# EAGLE board SMTCylonV13BurnV2 (EAGLE 5.07)
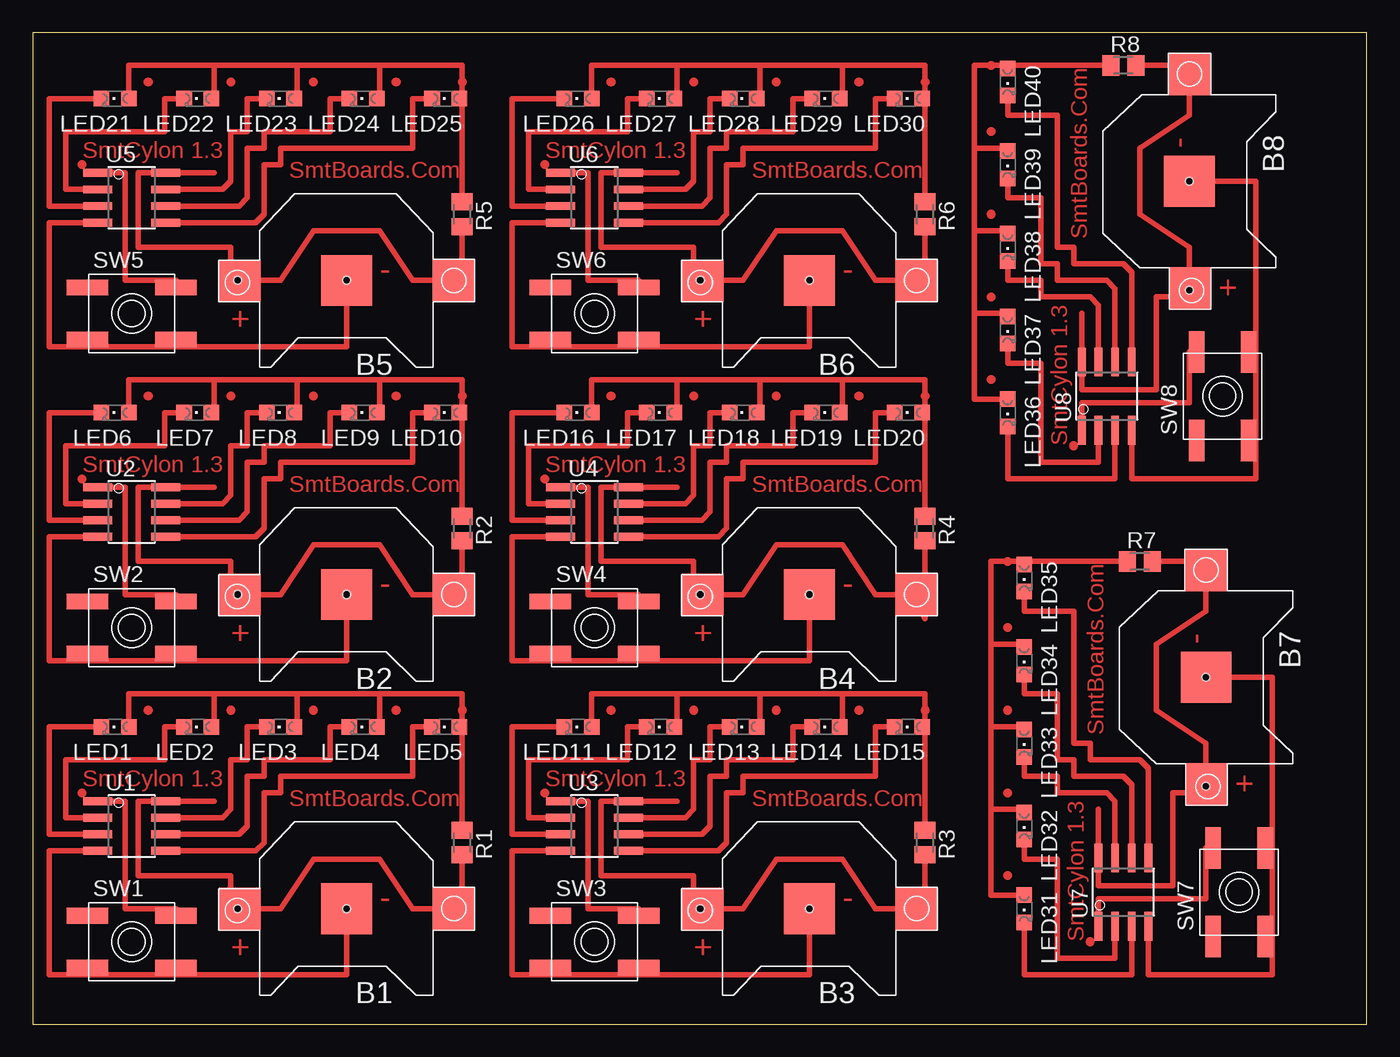
[diagram p0: board, top side]

Size 102.54 x 76.19 mm. Coordinates in mm from the lower left corner, seen from the top.
Outline: 0,0 102.54,0 102.54,76.19 0,76.19 0,0
Copper layers (1*16): Top 0.035mm / dielectric 1.5mm / Bottom 0.035mm
Design rules "default": minimum track width 10mil, minimum drill 24mil, track to track 8mil, track to pad 8mil, pad to pad 8mil, via to via 8mil, smd to smd 8mil, copper to edge 40mil, drill to drill 8mil, minimum pad ring 10mil, minimum via ring 8mil, stop-mask expansion 4mil, vias tented up to drill 0mil, thermal gap 10mil
Holes 0.6 mm at 15.75,8.89 24.13,8.89 15.75,33.02 24.13,33.02 51.31,8.89 59.69,8.89 51.31,33.02 59.69,33.02 15.75,57.15 24.13,57.15 51.31,57.15 59.69,57.15 90.17,18.29 90.17,26.67 88.9,56.39 88.9,64.77

## Footprints (pad centres in the part's own frame; a part is rotated, then mirrored left to right if it is on the bottom)
CR1220-SMD = smd 3.2 x 3.2: +$1 -8.2,0; +$2 8.2,0 | smd 3.9 x 3.9: - 0,0
CHIPLED_0805 = smd 1.2 x 1.2: A 0,-1.05; C 0,1.05
M0805 = smd 1.3 x 1.6: 1 -0.95,0; 2 0.95,0
EVQ-Q2 = smd 3.2 x 1.2: A -3.4,-2; A' 3.4,-2; B -3.4,2; B' 3.4,2
SO08 = smd 0.61 x 2.21: 1 -1.905,-2.616; 2 -0.635,-2.616; 3 0.635,-2.616; 4 1.905,-2.616; 5 1.905,2.616; 6 0.635,2.616; 7 -0.635,2.616; 8 -1.905,2.616

## Placement (x,y rotation side)
B1  [CR1220-SMD]  24.13,8.89 180 top
B2  [CR1220-SMD]  24.13,33.02 180 top
B3  [CR1220-SMD]  59.69,8.89 180 top
B4  [CR1220-SMD]  59.69,33.02 180 top
B5  [CR1220-SMD]  24.13,57.15 180 top
B6  [CR1220-SMD]  59.69,57.15 180 top
B7  [CR1220-SMD]  90.17,26.67 270 top
B8  [CR1220-SMD]  88.9,64.77 270 top
LED1  [CHIPLED_0805]  6.35,22.86 90 top
LED2  [CHIPLED_0805]  12.7,22.86 90 top
LED3  [CHIPLED_0805]  19.05,22.86 90 top
LED4  [CHIPLED_0805]  25.4,22.86 90 top
LED5  [CHIPLED_0805]  31.75,22.86 90 top
LED6  [CHIPLED_0805]  6.35,46.99 90 top
LED7  [CHIPLED_0805]  12.7,46.99 90 top
LED8  [CHIPLED_0805]  19.05,46.99 90 top
LED9  [CHIPLED_0805]  25.4,46.99 90 top
LED10  [CHIPLED_0805]  31.75,46.99 90 top
LED11  [CHIPLED_0805]  41.91,22.86 90 top
LED12  [CHIPLED_0805]  48.26,22.86 90 top
LED13  [CHIPLED_0805]  54.61,22.86 90 top
LED14  [CHIPLED_0805]  60.96,22.86 90 top
LED15  [CHIPLED_0805]  67.31,22.86 90 top
LED16  [CHIPLED_0805]  41.91,46.99 90 top
LED17  [CHIPLED_0805]  48.26,46.99 90 top
LED18  [CHIPLED_0805]  54.61,46.99 90 top
LED19  [CHIPLED_0805]  60.96,46.99 90 top
LED20  [CHIPLED_0805]  67.31,46.99 90 top
LED21  [CHIPLED_0805]  6.35,71.12 90 top
LED22  [CHIPLED_0805]  12.7,71.12 90 top
LED23  [CHIPLED_0805]  19.05,71.12 90 top
LED24  [CHIPLED_0805]  25.4,71.12 90 top
LED25  [CHIPLED_0805]  31.75,71.12 90 top
LED26  [CHIPLED_0805]  41.91,71.12 90 top
LED27  [CHIPLED_0805]  48.26,71.12 90 top
LED28  [CHIPLED_0805]  54.61,71.12 90 top
LED29  [CHIPLED_0805]  60.96,71.12 90 top
LED30  [CHIPLED_0805]  67.31,71.12 90 top
LED31  [CHIPLED_0805]  76.2,8.89 180 top
LED32  [CHIPLED_0805]  76.2,15.24 180 top
LED33  [CHIPLED_0805]  76.2,21.59 180 top
LED34  [CHIPLED_0805]  76.2,27.94 180 top
LED35  [CHIPLED_0805]  76.2,34.29 180 top
LED36  [CHIPLED_0805]  74.93,46.99 180 top
LED37  [CHIPLED_0805]  74.93,53.34 180 top
LED38  [CHIPLED_0805]  74.93,59.69 180 top
LED39  [CHIPLED_0805]  74.93,66.04 180 top
LED40  [CHIPLED_0805]  74.93,72.39 180 top
R1  180  [M0805]  33.02,13.97 270 top
R2  180  [M0805]  33.02,38.1 270 top
R3  180  [M0805]  68.58,13.97 270 top
R4  180  [M0805]  68.58,38.1 270 top
R5  180  [M0805]  33.02,62.23 270 top
R6  180  [M0805]  68.58,62.23 270 top
R7  180  [M0805]  85.09,35.56 0 top
R8  180  [M0805]  83.82,73.66 0 top
SW1  EVQQ2  [EVQ-Q2]  7.62,6.35 0 top
SW2  EVQQ2  [EVQ-Q2]  7.62,30.48 0 top
SW3  EVQQ2  [EVQ-Q2]  43.18,6.35 0 top
SW4  EVQQ2  [EVQ-Q2]  43.18,30.48 0 top
SW5  EVQQ2  [EVQ-Q2]  7.62,54.61 0 top
SW6  EVQQ2  [EVQ-Q2]  43.18,54.61 0 top
SW7  EVQQ2  [EVQ-Q2]  92.71,10.16 90 top
SW8  EVQQ2  [EVQ-Q2]  91.44,48.26 90 top
U1  TINY13S2  [SO08]  7.62,15.24 270 top
U2  TINY13S2  [SO08]  7.62,39.37 270 top
U3  TINY13S2  [SO08]  43.18,15.24 270 top
U4  TINY13S2  [SO08]  43.18,39.37 270 top
U5  TINY13S2  [SO08]  7.62,63.5 270 top
U6  TINY13S2  [SO08]  43.18,63.5 270 top
U7  TINY13S2  [SO08]  83.82,10.16 0 top
U8  TINY13S2  [SO08]  82.55,48.26 0 top

## Library data of the parts
B1-B8 R1-R8 SW1-SW8 = adafruit
LED1-LED40 = led
U1-U8 = avr-6

## Nets
GND1: B2.- SW2.A U2.4
GND2: B3.- SW3.A U3.4
GND3: B4.- SW4.A U4.4
GND4: B1.- SW1.A U1.4
GND5: B5.- SW5.A U5.4
GND6: B6.- SW6.A U6.4
GND7: B7.- SW7.A U7.4
GND8: B8.- SW8.A U8.4
N$1: LED6.C U2.3
N$2: LED7.C U2.2
N$3: LED8.C U2.7
N$4: LED9.C U2.6
N$5: LED10.C U2.5
N$6: LED6.A LED7.A LED8.A LED9.A LED10.A R2.1
N$7: SW2.B' U2.1
N$9: LED11.C U3.3
N$10: LED12.C U3.2
N$11: LED13.C U3.7
N$12: LED14.C U3.6
N$13: LED15.C U3.5
N$14: LED11.A LED12.A LED13.A LED14.A LED15.A R3.1
N$15: SW3.B' U3.1
N$17: LED16.C U4.3
N$18: LED17.C U4.2
N$19: LED18.C U4.7
N$20: LED19.C U4.6
N$21: LED20.C U4.5
N$22: LED16.A LED17.A LED18.A LED19.A LED20.A R4.1
N$23: SW4.B' U4.1
N$25: LED21.C U5.3
N$26: LED22.C U5.2
N$27: LED23.C U5.7
N$28: LED24.C U5.6
N$29: LED25.C U5.5
N$30: LED21.A LED22.A LED23.A LED24.A LED25.A R5.1
N$31: SW5.B' U5.1
N$33: LED1.C U1.3
N$34: LED2.C U1.2
N$35: LED3.C U1.7
N$36: LED4.C U1.6
N$37: LED5.C U1.5
N$38: LED1.A LED2.A LED3.A LED4.A LED5.A R1.1
N$39: SW1.B' U1.1
N$41: LED26.C U6.3
N$42: LED27.C U6.2
N$43: LED28.C U6.7
N$44: LED29.C U6.6
N$45: LED30.C U6.5
N$46: LED26.A LED27.A LED28.A LED29.A LED30.A R6.1
N$47: SW6.B' U6.1
N$49: LED31.C U7.3
N$50: LED32.C U7.2
N$51: LED33.C U7.7
N$52: LED34.C U7.6
N$53: LED35.C U7.5
N$54: LED31.A LED32.A LED33.A LED34.A LED35.A R7.1
N$55: SW7.B' U7.1
N$57: LED36.C U8.3
N$58: LED37.C U8.2
N$59: LED38.C U8.7
N$60: LED39.C U8.6
N$61: LED40.C U8.5
N$62: LED36.A LED37.A LED38.A LED39.A LED40.A R8.1
N$63: SW8.B' U8.1
VCC1: B2.+$1 B2.+$2 R2.2 U2.8
VCC2: B3.+$1 B3.+$2 R3.2 U3.8
VCC3: B4.+$1 B4.+$2 R4.2 U4.8
VCC4: B1.+$1 B1.+$2 R1.2 U1.8
VCC5: B5.+$1 B5.+$2 R5.2 U5.8
VCC6: B6.+$1 B6.+$2 R6.2 U6.8
VCC7: B7.+$1 B7.+$2 R7.2 U7.8
VCC8: B8.+$1 B8.+$2 R8.2 U8.8

## Tracks (layer width: path | path; a pad name or v marks a point on that pad's centre or on a via)
GND1
  Top 0.406: U2.4 1.27,37.47 1.27,27.94 4.22,27.94 | 4.22,27.94 24.13,27.94 B2.- | 4.22,27.94 SW2.A
GND2
  Top 0.406: U3.4 36.83,13.34 36.83,3.81 39.78,3.81 | 39.78,3.81 59.69,3.81 B3.- | 39.78,3.81 SW3.A
GND3
  Top 0.406: U4.4 36.83,37.47 36.83,27.94 39.78,27.94 | 39.78,27.94 59.69,27.94 B4.- | 39.78,27.94 SW4.A
GND4
  Top 0.406: U1.4 1.27,13.34 1.27,3.81 4.22,3.81 | 4.22,3.81 24.13,3.81 B1.- | 4.22,3.81 SW1.A
GND5
  Top 0.406: U5.4 1.27,61.59 1.27,52.07 4.22,52.07 | 4.22,52.07 24.13,52.07 B5.- | 4.22,52.07 SW5.A
GND6
  Top 0.406: U6.4 36.83,61.59 36.83,52.07 39.78,52.07 | 39.78,52.07 59.69,52.07 B6.- | 39.78,52.07 SW6.A
GND7
  Top 0.406: U7.4 85.72,3.81 95.25,3.81 95.25,6.76 | 95.25,6.76 95.25,26.67 B7.- | 95.25,6.76 SW7.A
GND8
  Top 0.406: U8.4 84.45,41.91 93.98,41.91 93.98,44.86 | 93.98,44.86 93.98,64.77 B8.- | 93.98,44.86 SW8.A
N$1
  Top 0.406: U2.3 1.27,38.73 1.27,46.99 LED6.C
N$2
  Top 0.406: U2.2 2.54,40.01 2.54,44.45 10.16,44.45 10.16,46.99 LED7.C
N$3
  Top 0.406: LED8.C 16.51,46.99 16.51,44.45 15.24,44.45 15.24,40.64 14.61,40.01 U2.7
N$4
  Top 0.406: LED9.C 22.86,46.99 22.86,44.45 17.78,44.45 17.78,43.18 16.51,43.18 16.51,39.37 15.88,38.73 U2.6
N$5
  Top 0.406: U2.5 17.14,37.47 17.78,38.1 17.78,41.91 19.05,41.91 19.05,43.18 29.21,43.18 29.21,46.99 LED10.C
N$6
  Top 0.406: 32.8,39.05 R2.1 33.02,46.99 | 33.02,46.99 LED10.A | 33.02,46.99 33.02,49.53 26.67,49.53 | LED9.A 26.67,46.99 26.67,49.53 | 20.32,49.53 26.67,49.53 | LED8.A 20.32,46.99 20.32,49.53 | 13.97,49.53 20.32,49.53 | 13.97,49.53 13.97,46.99 LED7.A | 13.97,49.53 7.4,49.53 LED6.A
N$7
  Top 0.406: U2.1 7.11,41.27 7.11,33.02 11.02,33.02 SW2.B'
N$8
  Top 0.406: 10.16,41.27 13.97,41.27
N$9
  Top 0.406: U3.3 36.83,14.61 36.83,22.86 LED11.C
N$10
  Top 0.406: U3.2 38.1,15.88 38.1,20.32 45.72,20.32 45.72,22.86 LED12.C
N$11
  Top 0.406: LED13.C 52.07,22.86 52.07,20.32 50.8,20.32 50.8,16.51 50.16,15.88 U3.7
N$12
  Top 0.406: LED14.C 58.42,22.86 58.42,20.32 53.34,20.32 53.34,19.05 52.07,19.05 52.07,15.24 51.44,14.61 U3.6
N$13
  Top 0.406: U3.5 52.7,13.34 53.34,13.97 53.34,17.78 54.61,17.78 54.61,19.05 64.77,19.05 64.77,22.86 LED15.C
N$14
  Top 0.406: 68.36,14.92 R3.1 68.58,22.86 | 68.58,22.86 LED15.A | 68.58,22.86 68.58,25.4 62.23,25.4 | LED14.A 62.23,22.86 62.23,25.4 | 55.88,25.4 62.23,25.4 | LED13.A 55.88,22.86 55.88,25.4 | 49.53,25.4 55.88,25.4 | 49.53,25.4 49.53,22.86 LED12.A | 49.53,25.4 42.96,25.4 LED11.A
N$15
  Top 0.406: U3.1 42.67,17.14 42.67,8.89 46.58,8.89 SW3.B'
N$16
  Top 0.406: 45.72,17.14 49.53,17.14
N$17
  Top 0.406: U4.3 36.83,38.73 36.83,46.99 LED16.C
N$18
  Top 0.406: U4.2 38.1,40.01 38.1,44.45 45.72,44.45 45.72,46.99 LED17.C
N$19
  Top 0.406: LED18.C 52.07,46.99 52.07,44.45 50.8,44.45 50.8,40.64 50.16,40.01 U4.7
N$20
  Top 0.406: LED19.C 58.42,46.99 58.42,44.45 53.34,44.45 53.34,43.18 52.07,43.18 52.07,39.37 51.44,38.73 U4.6
N$21
  Top 0.406: U4.5 52.7,37.47 53.34,38.1 53.34,41.91 54.61,41.91 54.61,43.18 64.77,43.18 64.77,46.99 LED20.C
N$22
  Top 0.406: 68.36,39.05 R4.1 68.58,46.99 | 68.58,46.99 LED20.A | 68.58,46.99 68.58,49.53 62.23,49.53 | LED19.A 62.23,46.99 62.23,49.53 | 55.88,49.53 62.23,49.53 | LED18.A 55.88,46.99 55.88,49.53 | 49.53,49.53 55.88,49.53 | 49.53,49.53 49.53,46.99 LED17.A | 49.53,49.53 42.96,49.53 LED16.A
N$23
  Top 0.406: U4.1 42.67,41.27 42.67,33.02 46.58,33.02 SW4.B'
N$24
  Top 0.406: 45.72,41.27 49.53,41.27
N$25
  Top 0.406: U5.3 1.27,62.87 1.27,71.12 LED21.C
N$26
  Top 0.406: U5.2 2.54,64.14 2.54,68.58 10.16,68.58 10.16,71.12 LED22.C
N$27
  Top 0.406: LED23.C 16.51,71.12 16.51,68.58 15.24,68.58 15.24,64.77 14.61,64.14 U5.7
N$28
  Top 0.406: LED24.C 22.86,71.12 22.86,68.58 17.78,68.58 17.78,67.31 16.51,67.31 16.51,63.5 15.88,62.87 U5.6
N$29
  Top 0.406: U5.5 17.14,61.59 17.78,62.23 17.78,66.04 19.05,66.04 19.05,67.31 29.21,67.31 29.21,71.12 LED25.C
N$30
  Top 0.406: 32.8,63.18 R5.1 33.02,71.12 | 33.02,71.12 LED25.A | 33.02,71.12 33.02,73.66 26.67,73.66 | LED24.A 26.67,71.12 26.67,73.66 | 20.32,73.66 26.67,73.66 | LED23.A 20.32,71.12 20.32,73.66 | 13.97,73.66 20.32,73.66 | 13.97,73.66 13.97,71.12 LED22.A | 13.97,73.66 7.4,73.66 LED21.A
N$31
  Top 0.406: U5.1 7.11,65.41 7.11,57.15 11.02,57.15 SW5.B'
N$32
  Top 0.406: 10.16,65.41 13.97,65.41
N$33
  Top 0.406: U1.3 1.27,14.61 1.27,22.86 LED1.C
N$34
  Top 0.406: U1.2 2.54,15.88 2.54,20.32 10.16,20.32 10.16,22.86 LED2.C
N$35
  Top 0.406: LED3.C 16.51,22.86 16.51,20.32 15.24,20.32 15.24,16.51 14.61,15.88 U1.7
N$36
  Top 0.406: LED4.C 22.86,22.86 22.86,20.32 17.78,20.32 17.78,19.05 16.51,19.05 16.51,15.24 15.88,14.61 U1.6
N$37
  Top 0.406: U1.5 17.14,13.34 17.78,13.97 17.78,17.78 19.05,17.78 19.05,19.05 29.21,19.05 29.21,22.86 LED5.C
N$38
  Top 0.406: 32.8,14.92 R1.1 33.02,22.86 | 33.02,22.86 LED5.A | 33.02,22.86 33.02,25.4 26.67,25.4 | LED4.A 26.67,22.86 26.67,25.4 | 20.32,25.4 26.67,25.4 | LED3.A 20.32,22.86 20.32,25.4 | 13.97,25.4 20.32,25.4 | 13.97,25.4 13.97,22.86 LED2.A | 13.97,25.4 7.4,25.4 LED1.A
N$39
  Top 0.406: U1.1 7.11,17.14 7.11,8.89 11.02,8.89 SW1.B'
N$40
  Top 0.406: 10.16,17.14 13.97,17.14
N$41
  Top 0.406: U6.3 36.83,62.87 36.83,71.12 LED26.C
N$42
  Top 0.406: U6.2 38.1,64.14 38.1,68.58 45.72,68.58 45.72,71.12 LED27.C
N$43
  Top 0.406: LED28.C 52.07,71.12 52.07,68.58 50.8,68.58 50.8,64.77 50.16,64.14 U6.7
N$44
  Top 0.406: LED29.C 58.42,71.12 58.42,68.58 53.34,68.58 53.34,67.31 52.07,67.31 52.07,63.5 51.44,62.87 U6.6
N$45
  Top 0.406: U6.5 52.7,61.59 53.34,62.23 53.34,66.04 54.61,66.04 54.61,67.31 64.77,67.31 64.77,71.12 LED30.C
N$46
  Top 0.406: 68.36,63.18 R6.1 68.58,71.12 | 68.58,71.12 LED30.A | 68.58,71.12 68.58,73.66 62.23,73.66 | LED29.A 62.23,71.12 62.23,73.66 | 55.88,73.66 62.23,73.66 | LED28.A 55.88,71.12 55.88,73.66 | 49.53,73.66 55.88,73.66 | 49.53,73.66 49.53,71.12 LED27.A | 49.53,73.66 42.96,73.66 LED26.A
N$47
  Top 0.406: U6.1 42.67,65.41 42.67,57.15 46.58,57.15 SW6.B'
N$48
  Top 0.406: 45.72,65.41 49.53,65.41
N$49
  Top 0.406: U7.3 84.45,3.81 76.2,3.81 LED31.C
N$50
  Top 0.406: U7.2 83.19,5.08 78.74,5.08 78.74,12.7 76.2,12.7 LED32.C
N$51
  Top 0.406: LED33.C 76.2,19.05 78.74,19.05 78.74,17.78 82.55,17.78 83.19,17.14 U7.7
N$52
  Top 0.406: LED34.C 76.2,25.4 78.74,25.4 78.74,20.32 80.01,20.32 80.01,19.05 83.82,19.05 84.45,18.41 U7.6
N$53
  Top 0.406: U7.5 85.72,19.68 85.09,20.32 81.28,20.32 81.28,21.59 80.01,21.59 80.01,31.75 76.2,31.75 LED35.C
N$54
  Top 0.406: 84.14,35.34 R7.1 76.2,35.56 | 76.2,35.56 LED35.A | 76.2,35.56 73.66,35.56 73.66,29.21 | LED34.A 76.2,29.21 73.66,29.21 | 73.66,22.86 73.66,29.21 | LED33.A 76.2,22.86 73.66,22.86 | 73.66,16.51 73.66,22.86 | 73.66,16.51 76.2,16.51 LED32.A | 73.66,16.51 73.66,9.94 LED31.A
N$55
  Top 0.406: U7.1 81.92,9.65 90.17,9.65 90.17,13.56 SW7.B'
N$56
  Top 0.406: 81.92,12.7 81.92,16.51
N$57
  Top 0.406: U8.3 83.19,41.91 74.93,41.91 LED36.C
N$58
  Top 0.406: U8.2 81.92,43.18 77.47,43.18 77.47,50.8 74.93,50.8 LED37.C
N$59
  Top 0.406: LED38.C 74.93,57.15 77.47,57.15 77.47,55.88 81.28,55.88 81.92,55.24 U8.7
N$60
  Top 0.406: LED39.C 74.93,63.5 77.47,63.5 77.47,58.42 78.74,58.42 78.74,57.15 82.55,57.15 83.19,56.52 U8.6
N$61
  Top 0.406: U8.5 84.45,57.78 83.82,58.42 80.01,58.42 80.01,59.69 78.74,59.69 78.74,69.85 74.93,69.85 LED40.C
N$62
  Top 0.406: 82.87,73.44 R8.1 74.93,73.66 | 74.93,73.66 LED40.A | 74.93,73.66 72.39,73.66 72.39,67.31 | LED39.A 74.93,67.31 72.39,67.31 | 72.39,60.96 72.39,67.31 | LED38.A 74.93,60.96 72.39,60.96 | 72.39,54.61 72.39,60.96 | 72.39,54.61 74.93,54.61 LED37.A | 72.39,54.61 72.39,48.04 LED36.A
N$63
  Top 0.406: U8.1 80.64,47.75 88.9,47.75 88.9,51.66 SW8.B'
N$64
  Top 0.406: 80.64,50.8 80.64,54.61
VCC1
  Top 0.406: U2.8 8.13,41.27 8.13,35.56 15.24,35.56 15.24,33.02 B2.+$2 19.05,33.02 21.59,36.83 26.67,36.83 29.21,33.02 B2.+$1 33.02,33.71 R2.2
VCC2
  Top 0.406: U3.8 43.69,17.14 43.69,11.43 50.8,11.43 50.8,8.89 B3.+$2 54.61,8.89 57.15,12.7 62.23,12.7 64.77,8.89 B3.+$1 68.58,9.58 R3.2
VCC3
  Top 0.406: U4.8 43.69,41.27 43.69,35.56 50.8,35.56 50.8,33.02 B4.+$2 54.61,33.02 57.15,36.83 62.23,36.83 64.77,33.02 B4.+$1 68.58,31.17 R4.2
VCC4
  Top 0.406: U1.8 8.13,17.14 8.13,11.43 15.24,11.43 15.24,8.89 B1.+$2 19.05,8.89 21.59,12.7 26.67,12.7 29.21,8.89 B1.+$1 33.02,9.58 R1.2
VCC5
  Top 0.406: U5.8 8.13,65.41 8.13,59.69 15.24,59.69 15.24,57.15 B5.+$2 19.05,57.15 21.59,60.96 26.67,60.96 29.21,57.15 B5.+$1 33.02,57.84 R5.2
VCC6
  Top 0.406: U6.8 43.69,65.41 43.69,59.69 50.8,59.69 50.8,57.15 B6.+$2 54.61,57.15 57.15,60.96 62.23,60.96 64.77,57.15 B6.+$1 68.58,57.84 R6.2
VCC7
  Top 0.406: U7.8 81.92,10.67 87.63,10.67 87.63,17.78 90.17,17.78 B7.+$2 90.17,21.59 86.36,24.13 86.36,29.21 90.17,31.75 B7.+$1 89.48,35.56 R7.2
VCC8
  Top 0.406: U8.8 80.64,48.77 86.36,48.77 86.36,55.88 88.9,55.88 B8.+$2 88.9,59.69 85.09,62.23 85.09,67.31 88.9,69.85 B8.+$1 88.21,73.66 R8.2
(copper drawn outside any net)
  shapes: Top circle x48

## Text on the board
Top: SmtCylon 1.3 | SmtCylon 1.3 | - | SmtBoards.Com | SmtBoards.Com | SmtBoards.Com | - | - | + | + | + | SmtCylon 1.3 | SmtCylon 1.3 | SmtCylon 1.3 | SmtBoards.Com | SmtBoards.Com | - | - | + | + | - | SmtBoards.Com | SmtCylon 1.3 | SmtCylon 1.3 | + | SmtBoards.Com | SmtBoards.Com | - | - | SmtCylon 1.3 | + | +